# Altium PCB KUOZHAN.PCBDOC (part 5 of 21)
Units mm, origin at the board's own origin, x right, y up, seen from the top; angles counter-clockwise.
Board outline 165.51 x 116.38 mm, 2 copper layers (Top Layer, Bottom Layer); 171 components, 245 nets, 894 pads, 298 vias.
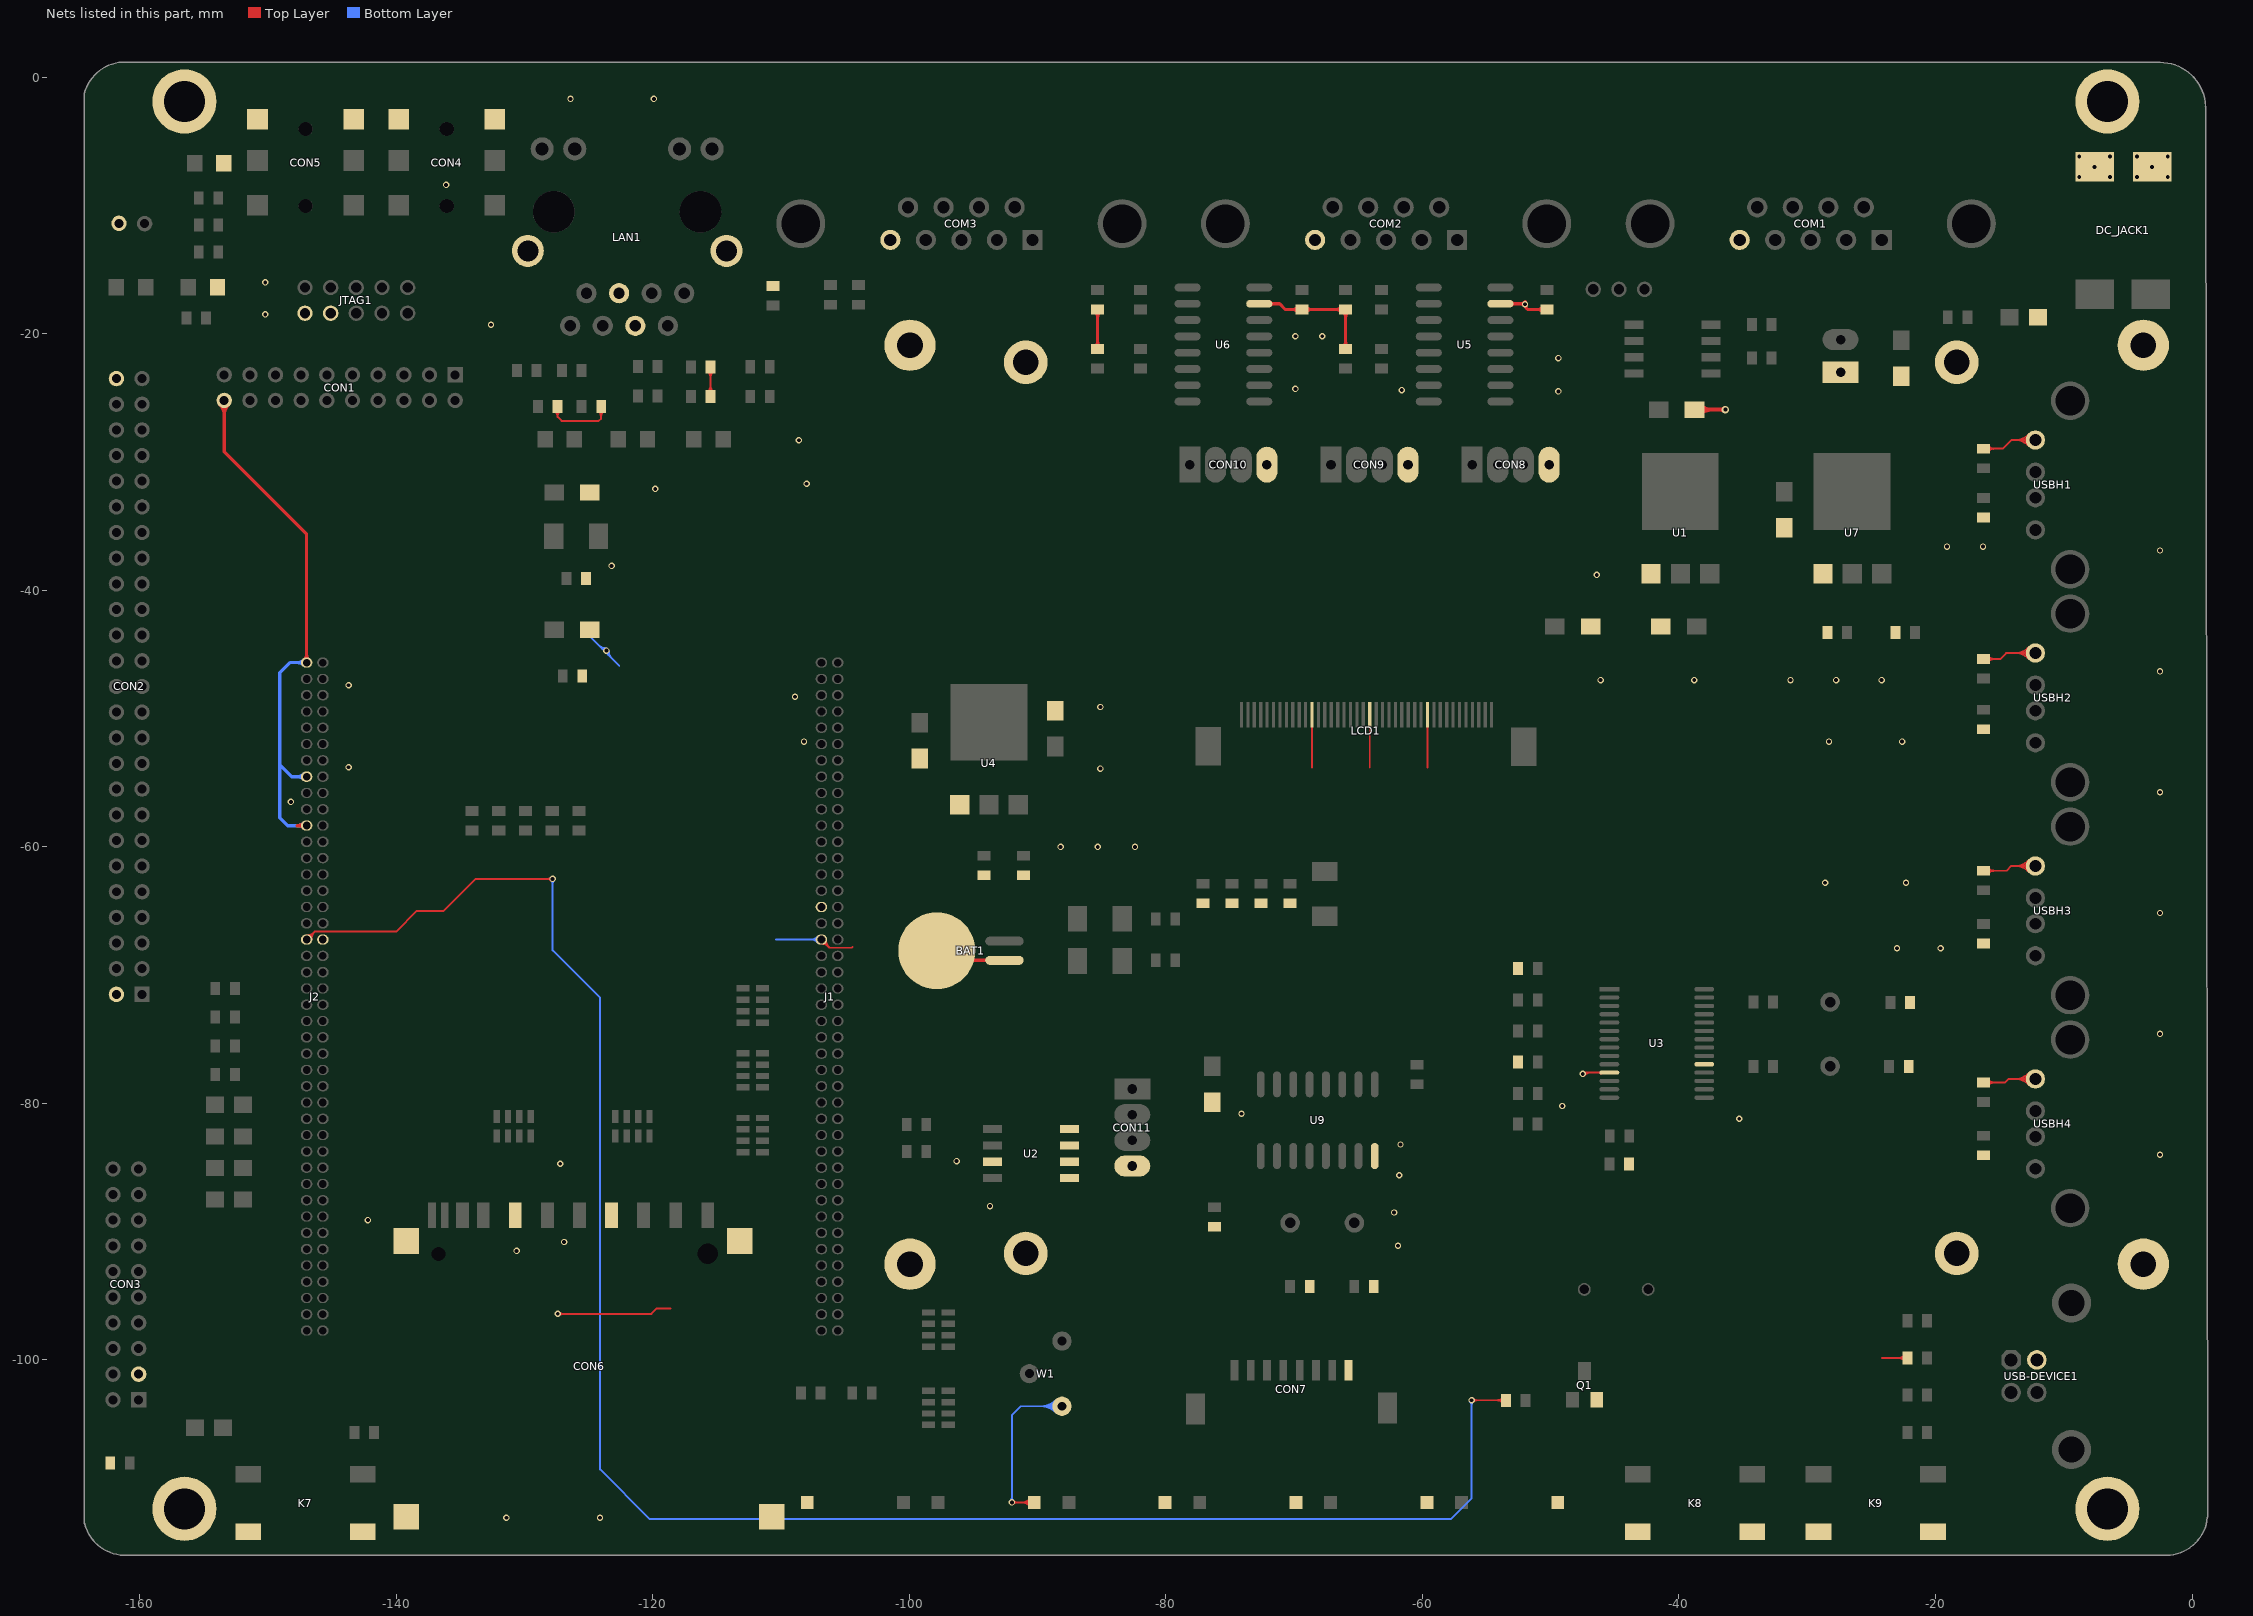
[diagram p5: the nets of this part, all layers, seen from the top]

## Via types
v1: diameter 0.5, hole 0.3, Top Layer to Bottom Layer, 272 vias
v2: diameter 0.6, hole 0.3, Top Layer to Bottom Layer, 24 vias
v3: diameter 0.9, hole 0.9, Top Layer to Bottom Layer, 2 vias

## Nets (pads, with @x,y where several pads share a name; then routed paths per layer and width w, separated by ;. In a path a pad name is that pad's centre, name@x,y a point inside that pad or via, vN(x,y) a via of type N, cw(c..) or ccw(c..) an arc to the next point about the centre after c; other vN are vias at no path point) (continued)
GND: BAT1.2 C1.2 C2.2 C3.2 C4.2 C6.2 C7.2 C8.2 C11.1 C12.1 C13.1 C14.1 C16.2 C17.1 C18.1 C19.1 C20.2 C21.2 C22.2 C23.2 C24.2 C25.2 C26.2 C27.2 C28.2 C29.2 C30.2 C31.2 C36.2 C37.2 C38.2 C39.2 C40.2 C41.2 C42.2 C43.2 CD1.2 COM1.5 COM2.5 COM3.5 CON1.20 CON2.2 CON2.50 CON3.3 CON4.1 CON4.2 CON5.1 CON5.2 CON6.3 CON6.6 CON6.12 CON6.13 CON6.14 CON6.15 CON7.8 CON8.4 CON9.4 CON10.4 CON11.4 CON12.1 DC_JACK1.1 DC_JACK1.4 J1.31 J1.35 J2.1 J2.15 J2.21 JTAG1.8 JTAG1.10 K1.2 K2.2 K3.2 K4.2 K5.2 K6.2 K7.1 K7.2 K8.3 K8.4 K9.1 K9.2 LAN1.4 LAN1.5 LAN1.A LAN1.B LCD1.11 LCD1.20 LCD1.29 LED5.2 MIC1.2 pad. pad.0 pad.1 Q1.E R1.1 R11.1 R12.1 R23.2 R25.2 R30.2 R36.2 R37.2 R38.2 R39.2 R42.2 R43.2 R44.2 R45.2 R53.1 U1.2 U2.1 U2.2 U2.3 U2.4 U2.7 U3.11 U3.19 U4.2 U5.15 U6.15 U7.2 U9.8 USB-DEVICE1.4 USBH1.4 USBH2.4 USBH3.4 USBH4.4 W1.1 | length 416.6
  Top Layer w0.15: R12.1@-127.413,-25.66 -127.413,-26.487 ; v1(-127.4,-96.4) -120.1,-96.4 -119.7,-96 -118.6,-96 ; R11.1@-124.013,-25.66 -124.013,-26.613 -124.2,-26.8 -127.1,-26.8 -127.413,-26.487 ; CD1.2@-115.486,-24.883 C21.2@-115.486,-22.583 ; J1.35@-106.841,-67.243 -106.216,-67.868 -104.468,-67.868 -104.4,-67.8 ; v1(-92,-111.1) K2.2@-90.25,-111.1 ; v1@-91.876,-111.224 cw(c-91.578,-111.522) -91.578,-111.1 cw(c-91.578,-110.678) v1@-91.876,-110.976 ; K2.2@-90.551,-111.401 ccw(c-91.276,-112.126) -91.276,-111.1 ccw(c-91.276,-110.074) K2.2@-90.551,-110.799 ; K2.2@-90.444,-111.294 ccw(c-90.914,-111.764) -90.914,-111.1 ccw(c-90.914,-110.436) K2.2@-90.444,-110.906 ; -68.6,-53.8 LCD1.29@-68.6,-49.7 ; -64.1,-53.8 LCD1.20@-64.1,-49.7 ; -59.6,-53.8 LCD1.11@-59.6,-49.7 ; v1(-47.5,-77.7) -47.4,-77.6 U3.11@-45.35,-77.6 ; v1@-47.482,-77.718 cw(c-47.198,-78.002) -47.198,-77.6 ; v1@-47.376,-77.824 cw(c-46.836,-78.364) -46.836,-77.6 ; U3.11@-46.099,-77.664 ccw(c-46.252,-77.817) -46.252,-77.6 ccw(c-46.252,-77.383) U3.11@-46.099,-77.536 ; U3.11@-46.044,-77.664 ccw(c-46.197,-77.817) -46.197,-77.6 ccw(c-46.197,-77.383) U3.11@-46.044,-77.536 ; -24.159,-99.841 R25.2@-22.187,-99.841 ; R45.2@-16.241,-78.363 -14.563,-78.363 -14.291,-78.091 USBH4.4@-12.213,-78.091 ; R43.2@-16.241,-61.863 -14.463,-61.863 -14.091,-61.491 USBH3.4@-12.213,-61.491 ; R39.2@-16.241,-45.363 -14.963,-45.363 -14.491,-44.891 USBH2.4@-12.213,-44.891 ; R37.2@-16.241,-28.963 -14.763,-28.963 -14.091,-28.291 USBH1.4@-12.213,-28.291 ; R12.1@-127.621,-26.011 cw(c-128.062,-26.487) -127.413,-26.487 ; R12.1@-127.621,-26.011 cw(c-128.062,-26.487) -127.413,-26.487 ; R12.1@-127.621,-26.011 cw(c-128.062,-26.487) -127.413,-26.487 ; R12.1@-127.621,-26.011 cw(c-128.062,-26.487) -127.413,-26.487 ; R12.1@-127.621,-26.011 cw(c-128.062,-26.487) -127.413,-26.487 ; -127.413,-26.487 cw(c-126.763,-26.487) R12.1@-127.205,-26.011 ; -127.413,-26.487 cw(c-126.763,-26.487) R12.1@-127.205,-26.011 ; -127.413,-26.487 cw(c-126.763,-26.487) R12.1@-127.205,-26.011 ; -127.413,-26.487 cw(c-126.763,-26.487) R12.1@-127.205,-26.011 ; -127.413,-26.487 cw(c-126.763,-26.487) R12.1@-127.205,-26.011 ; -126.978,-96.4 cw(c-126.978,-95.978) -127.276,-96.276 ccw(c-126.978,-95.978) -126.978,-96.4 ; -126.978,-96.4 ccw(c-126.978,-96.822) -127.276,-96.524 cw(c-126.978,-96.822) -126.978,-96.4 ; R11.1@-124.229,-26.003 cw(c-124.751,-26.525) -124.013,-26.525 ; R11.1@-124.229,-26.003 cw(c-124.751,-26.525) -124.013,-26.525 ; R11.1@-124.229,-26.003 cw(c-124.751,-26.525) -124.013,-26.525 ; R11.1@-124.229,-26.003 cw(c-124.751,-26.525) -124.013,-26.525 ; R11.1@-124.229,-26.003 cw(c-124.751,-26.525) -124.013,-26.525 ; -124.013,-26.525 cw(c-123.274,-26.525) R11.1@-123.796,-26.003 ; -124.013,-26.525 cw(c-123.274,-26.525) R11.1@-123.796,-26.003 ; -124.013,-26.525 cw(c-123.274,-26.525) R11.1@-123.796,-26.003 ; -124.013,-26.525 cw(c-123.274,-26.525) R11.1@-123.796,-26.003 ; -124.013,-26.525 cw(c-123.274,-26.525) R11.1@-123.796,-26.003 ; CD1.2@-115.702,-24.54 ccw(c-116.225,-24.018) -115.486,-24.018 ; CD1.2@-115.702,-24.54 ccw(c-116.225,-24.018) -115.486,-24.018 ; CD1.2@-115.702,-24.54 ccw(c-116.225,-24.018) -115.486,-24.018 ; CD1.2@-115.702,-24.54 ccw(c-116.225,-24.018) -115.486,-24.018 ; CD1.2@-115.702,-24.54 ccw(c-116.225,-24.018) -115.486,-24.018 ; C21.2@-115.702,-22.927 cw(c-116.225,-23.449) -115.486,-23.449 ; C21.2@-115.702,-22.927 cw(c-116.225,-23.449) -115.486,-23.449 ; C21.2@-115.702,-22.927 cw(c-116.225,-23.449) -115.486,-23.449 ; C21.2@-115.702,-22.927 cw(c-116.225,-23.449) -115.486,-23.449 ; C21.2@-115.702,-22.927 cw(c-116.225,-23.449) -115.486,-23.449 ; -115.486,-24.018 ccw(c-114.747,-24.018) CD1.2@-115.269,-24.54 ; -115.486,-24.018 ccw(c-114.747,-24.018) CD1.2@-115.269,-24.54 ; -115.486,-24.018 ccw(c-114.747,-24.018) CD1.2@-115.269,-24.54 ; -115.486,-24.018 ccw(c-114.747,-24.018) CD1.2@-115.269,-24.54 ; -115.486,-24.018 ccw(c-114.747,-24.018) CD1.2@-115.269,-24.54 ; -115.486,-23.449 cw(c-114.747,-23.449) C21.2@-115.269,-22.927 ; -115.486,-23.449 cw(c-114.747,-23.449) C21.2@-115.269,-22.927 ; -115.486,-23.449 cw(c-114.747,-23.449) C21.2@-115.269,-22.927 ; -115.486,-23.449 cw(c-114.747,-23.449) C21.2@-115.269,-22.927 ; -115.486,-23.449 cw(c-114.747,-23.449) C21.2@-115.269,-22.927 ; -22.926,-99.841 cw(c-22.926,-100.58) R25.2@-22.404,-100.058 ; -22.926,-99.841 ccw(c-22.926,-99.103) R25.2@-22.404,-99.625 ; -22.926,-99.841 cw(c-22.926,-100.58) R25.2@-22.404,-100.058 ; -22.926,-99.841 ccw(c-22.926,-99.103) R25.2@-22.404,-99.625 ; -22.926,-99.841 cw(c-22.926,-100.58) R25.2@-22.404,-100.058 ; -22.926,-99.841 ccw(c-22.926,-99.103) R25.2@-22.404,-99.625 ; -22.926,-99.841 cw(c-22.926,-100.58) R25.2@-22.404,-100.058 ; -22.926,-99.841 ccw(c-22.926,-99.103) R25.2@-22.404,-99.625 ; -22.926,-99.841 ccw(c-22.926,-99.103) R25.2@-22.404,-99.625 ; -22.926,-99.841 cw(c-22.926,-100.58) R25.2@-22.404,-100.058 ; R45.2@-15.898,-78.58 cw(c-15.376,-79.102) -15.376,-78.363 ; R45.2@-15.898,-78.58 cw(c-15.376,-79.102) -15.376,-78.363 ; R45.2@-15.898,-78.58 cw(c-15.376,-79.102) -15.376,-78.363 ; R45.2@-15.898,-78.58 cw(c-15.376,-79.102) -15.376,-78.363 ; R45.2@-15.898,-78.58 cw(c-15.376,-79.102) -15.376,-78.363 ; R45.2@-15.898,-78.147 ccw(c-15.376,-77.625) -15.376,-78.363 ; R45.2@-15.898,-78.147 ccw(c-15.376,-77.625) -15.376,-78.363 ; R45.2@-15.898,-78.147 ccw(c-15.376,-77.625) -15.376,-78.363 ; R45.2@-15.898,-78.147 ccw(c-15.376,-77.625) -15.376,-78.363 ; R45.2@-15.898,-78.147 ccw(c-15.376,-77.625) -15.376,-78.363 ; R43.2@-15.898,-62.08 cw(c-15.376,-62.602) -15.376,-61.863 ; R43.2@-15.898,-62.08 cw(c-15.376,-62.602) -15.376,-61.863 ; R43.2@-15.898,-62.08 cw(c-15.376,-62.602) -15.376,-61.863 ; R43.2@-15.898,-62.08 cw(c-15.376,-62.602) -15.376,-61.863 ; R43.2@-15.898,-62.08 cw(c-15.376,-62.602) -15.376,-61.863 ; R43.2@-15.898,-61.647 ccw(c-15.376,-61.125) -15.376,-61.863 ; R43.2@-15.898,-61.647 ccw(c-15.376,-61.125) -15.376,-61.863 ; R43.2@-15.898,-61.647 ccw(c-15.376,-61.125) -15.376,-61.863 ; R43.2@-15.898,-61.647 ccw(c-15.376,-61.125) -15.376,-61.863 ; R43.2@-15.898,-61.647 ccw(c-15.376,-61.125) -15.376,-61.863 ; R39.2@-15.898,-45.58 cw(c-15.376,-46.102) -15.376,-45.363 ; R39.2@-15.898,-45.58 cw(c-15.376,-46.102) -15.376,-45.363 ; R39.2@-15.898,-45.58 cw(c-15.376,-46.102) -15.376,-45.363 ; R39.2@-15.898,-45.58 cw(c-15.376,-46.102) -15.376,-45.363 ; R39.2@-15.898,-45.58 cw(c-15.376,-46.102) -15.376,-45.363 ; R39.2@-15.898,-45.147 ccw(c-15.376,-44.625) -15.376,-45.363 ; R39.2@-15.898,-45.147 ccw(c-15.376,-44.625) -15.376,-45.363 ; R39.2@-15.898,-45.147 ccw(c-15.376,-44.625) -15.376,-45.363 ; R39.2@-15.898,-45.147 ccw(c-15.376,-44.625) -15.376,-45.363 ; R39.2@-15.898,-45.147 ccw(c-15.376,-44.625) -15.376,-45.363 ; R37.2@-15.898,-29.18 cw(c-15.376,-29.702) -15.376,-28.963 ; R37.2@-15.898,-29.18 cw(c-15.376,-29.702) -15.376,-28.963 ; R37.2@-15.898,-29.18 cw(c-15.376,-29.702) -15.376,-28.963 ; R37.2@-15.898,-29.18 cw(c-15.376,-29.702) -15.376,-28.963 ; R37.2@-15.898,-29.18 cw(c-15.376,-29.702) -15.376,-28.963 ; R37.2@-15.898,-28.747 ccw(c-15.376,-28.225) -15.376,-28.963 ; R37.2@-15.898,-28.747 ccw(c-15.376,-28.225) -15.376,-28.963 ; R37.2@-15.898,-28.747 ccw(c-15.376,-28.225) -15.376,-28.963 ; R37.2@-15.898,-28.747 ccw(c-15.376,-28.225) -15.376,-28.963 ; R37.2@-15.898,-28.747 ccw(c-15.376,-28.225) -15.376,-28.963 ; -13.843,-78.091 cw(c-13.843,-79.721) USBH4.4@-12.691,-78.569 ; -13.843,-78.091 ccw(c-13.843,-76.462) USBH4.4@-12.691,-77.614 ; -13.843,-78.091 cw(c-13.843,-79.721) USBH4.4@-12.691,-78.569 ; -13.843,-78.091 ccw(c-13.843,-76.462) USBH4.4@-12.691,-77.614 ; -13.843,-78.091 cw(c-13.843,-79.721) USBH4.4@-12.691,-78.569 ; -13.843,-78.091 ccw(c-13.843,-76.462) USBH4.4@-12.691,-77.614 ; -13.843,-78.091 cw(c-13.843,-79.721) USBH4.4@-12.691,-78.569 ; -13.843,-78.091 ccw(c-13.843,-76.462) USBH4.4@-12.691,-77.614 ; -13.843,-78.091 ccw(c-13.843,-76.462) USBH4.4@-12.691,-77.614 ; -13.843,-78.091 cw(c-13.843,-79.721) USBH4.4@-12.691,-78.569 ; -13.843,-61.491 cw(c-13.843,-63.121) USBH3.4@-12.691,-61.969 ; -13.843,-61.491 ccw(c-13.843,-59.862) USBH3.4@-12.691,-61.014 ; -13.843,-61.491 cw(c-13.843,-63.121) USBH3.4@-12.691,-61.969 ; -13.843,-61.491 ccw(c-13.843,-59.862) USBH3.4@-12.691,-61.014 ; -13.843,-61.491 cw(c-13.843,-63.121) USBH3.4@-12.691,-61.969 ; -13.843,-61.491 ccw(c-13.843,-59.862) USBH3.4@-12.691,-61.014 ; -13.843,-61.491 cw(c-13.843,-63.121) USBH3.4@-12.691,-61.969 ; -13.843,-61.491 ccw(c-13.843,-59.862) USBH3.4@-12.691,-61.014 ; -13.843,-61.491 ccw(c-13.843,-59.862) USBH3.4@-12.691,-61.014 ; -13.843,-61.491 cw(c-13.843,-63.121) USBH3.4@-12.691,-61.969 ; -13.843,-44.891 cw(c-13.843,-46.521) USBH2.4@-12.691,-45.369 ; -13.843,-44.891 ccw(c-13.843,-43.262) USBH2.4@-12.691,-44.414 ; -13.843,-44.891 cw(c-13.843,-46.521) USBH2.4@-12.691,-45.369 ; -13.843,-44.891 ccw(c-13.843,-43.262) USBH2.4@-12.691,-44.414 ; -13.843,-44.891 cw(c-13.843,-46.521) USBH2.4@-12.691,-45.369 ; -13.843,-44.891 ccw(c-13.843,-43.262) USBH2.4@-12.691,-44.414 ; -13.843,-44.891 cw(c-13.843,-46.521) USBH2.4@-12.691,-45.369 ; -13.843,-44.891 ccw(c-13.843,-43.262) USBH2.4@-12.691,-44.414 ; -13.843,-44.891 ccw(c-13.843,-43.262) USBH2.4@-12.691,-44.414 ; -13.843,-44.891 cw(c-13.843,-46.521) USBH2.4@-12.691,-45.369 ; -13.843,-28.291 cw(c-13.843,-29.921) USBH1.4@-12.691,-28.769 ; -13.843,-28.291 ccw(c-13.843,-26.662) USBH1.4@-12.691,-27.814 ; -13.843,-28.291 cw(c-13.843,-29.921) USBH1.4@-12.691,-28.769 ; -13.843,-28.291 ccw(c-13.843,-26.662) USBH1.4@-12.691,-27.814 ; -13.843,-28.291 cw(c-13.843,-29.921) USBH1.4@-12.691,-28.769 ; -13.843,-28.291 ccw(c-13.843,-26.662) USBH1.4@-12.691,-27.814 ; -13.843,-28.291 cw(c-13.843,-29.921) USBH1.4@-12.691,-28.769 ; -13.843,-28.291 ccw(c-13.843,-26.662) USBH1.4@-12.691,-27.814 ; -13.843,-28.291 ccw(c-13.843,-26.662) USBH1.4@-12.691,-27.814 ; -13.843,-28.291 cw(c-13.843,-29.921) USBH1.4@-12.691,-28.769 ; -13.481,-78.091 cw(c-13.481,-79.359) USBH4.4@-12.585,-78.462 ; -13.481,-78.091 ccw(c-13.481,-76.824) USBH4.4@-12.585,-77.72 ; -13.481,-78.091 cw(c-13.481,-79.359) USBH4.4@-12.585,-78.462 ; -13.481,-78.091 ccw(c-13.481,-76.824) USBH4.4@-12.585,-77.72 ; -13.481,-78.091 cw(c-13.481,-79.359) USBH4.4@-12.585,-78.462 ; -13.481,-78.091 ccw(c-13.481,-76.824) USBH4.4@-12.585,-77.72 ; -13.481,-78.091 cw(c-13.481,-79.359) USBH4.4@-12.585,-78.462 ; -13.481,-78.091 ccw(c-13.481,-76.824) USBH4.4@-12.585,-77.72 ; -13.481,-78.091 ccw(c-13.481,-76.824) USBH4.4@-12.585,-77.72 ; -13.481,-78.091 cw(c-13.481,-79.359) USBH4.4@-12.585,-78.462 ; -13.481,-61.491 cw(c-13.481,-62.759) USBH3.4@-12.585,-61.862 ; -13.481,-61.491 ccw(c-13.481,-60.224) USBH3.4@-12.585,-61.12 ; -13.481,-61.491 cw(c-13.481,-62.759) USBH3.4@-12.585,-61.862 ; -13.481,-61.491 ccw(c-13.481,-60.224) USBH3.4@-12.585,-61.12 ; -13.481,-61.491 cw(c-13.481,-62.759) USBH3.4@-12.585,-61.862 ; -13.481,-61.491 ccw(c-13.481,-60.224) USBH3.4@-12.585,-61.12 ; -13.481,-61.491 cw(c-13.481,-62.759) USBH3.4@-12.585,-61.862 ; -13.481,-61.491 ccw(c-13.481,-60.224) USBH3.4@-12.585,-61.12 ; -13.481,-61.491 ccw(c-13.481,-60.224) USBH3.4@-12.585,-61.12 ; -13.481,-61.491 cw(c-13.481,-62.759) USBH3.4@-12.585,-61.862 ; -13.481,-44.891 cw(c-13.481,-46.159) USBH2.4@-12.585,-45.262 ; -13.481,-44.891 ccw(c-13.481,-43.624) USBH2.4@-12.585,-44.52 ; -13.481,-44.891 cw(c-13.481,-46.159) USBH2.4@-12.585,-45.262 ; -13.481,-44.891 ccw(c-13.481,-43.624) USBH2.4@-12.585,-44.52 ; -13.481,-44.891 cw(c-13.481,-46.159) USBH2.4@-12.585,-45.262 ; -13.481,-44.891 ccw(c-13.481,-43.624) USBH2.4@-12.585,-44.52 ; -13.481,-44.891 cw(c-13.481,-46.159) USBH2.4@-12.585,-45.262 ; -13.481,-44.891 ccw(c-13.481,-43.624) USBH2.4@-12.585,-44.52 ; -13.481,-44.891 ccw(c-13.481,-43.624) USBH2.4@-12.585,-44.52 ; -13.481,-44.891 cw(c-13.481,-46.159) USBH2.4@-12.585,-45.262 ; -13.481,-28.291 cw(c-13.481,-29.559) USBH1.4@-12.585,-28.662 ; -13.481,-28.291 ccw(c-13.481,-27.024) USBH1.4@-12.585,-27.92 ; -13.481,-28.291 cw(c-13.481,-29.559) USBH1.4@-12.585,-28.662 ; -13.481,-28.291 ccw(c-13.481,-27.024) USBH1.4@-12.585,-27.92 ; -13.481,-28.291 cw(c-13.481,-29.559) USBH1.4@-12.585,-28.662 ; -13.481,-28.291 ccw(c-13.481,-27.024) USBH1.4@-12.585,-27.92 ; -13.481,-28.291 cw(c-13.481,-29.559) USBH1.4@-12.585,-28.662 ; -13.481,-28.291 ccw(c-13.481,-27.024) USBH1.4@-12.585,-27.92 ; -13.481,-28.291 ccw(c-13.481,-27.024) USBH1.4@-12.585,-27.92 ; -13.481,-28.291 cw(c-13.481,-29.559) USBH1.4@-12.585,-28.662 ; -13.119,-78.091 cw(c-13.119,-78.997) USBH4.4@-12.479,-78.356 ; -13.119,-78.091 ccw(c-13.119,-77.186) USBH4.4@-12.479,-77.826 ; -13.119,-78.091 cw(c-13.119,-78.997) USBH4.4@-12.479,-78.356 ; -13.119,-78.091 ccw(c-13.119,-77.186) USBH4.4@-12.479,-77.826 ; -13.119,-78.091 cw(c-13.119,-78.997) USBH4.4@-12.479,-78.356 ; -13.119,-78.091 ccw(c-13.119,-77.186) USBH4.4@-12.479,-77.826 ; -13.119,-78.091 cw(c-13.119,-78.997) USBH4.4@-12.479,-78.356 ; -13.119,-78.091 ccw(c-13.119,-77.186) USBH4.4@-12.479,-77.826 ; -13.119,-78.091 ccw(c-13.119,-77.186) USBH4.4@-12.479,-77.826 ; -13.119,-78.091 cw(c-13.119,-78.997) USBH4.4@-12.479,-78.356 ; -13.119,-61.491 cw(c-13.119,-62.397) USBH3.4@-12.479,-61.756 ; -13.119,-61.491 ccw(c-13.119,-60.586) USBH3.4@-12.479,-61.226 ; -13.119,-61.491 cw(c-13.119,-62.397) USBH3.4@-12.479,-61.756 ; -13.119,-61.491 ccw(c-13.119,-60.586) USBH3.4@-12.479,-61.226 ; -13.119,-61.491 cw(c-13.119,-62.397) USBH3.4@-12.479,-61.756 ; -13.119,-61.491 ccw(c-13.119,-60.586) USBH3.4@-12.479,-61.226 ; -13.119,-61.491 cw(c-13.119,-62.397) USBH3.4@-12.479,-61.756 ; -13.119,-61.491 ccw(c-13.119,-60.586) USBH3.4@-12.479,-61.226 ; -13.119,-61.491 ccw(c-13.119,-60.586) USBH3.4@-12.479,-61.226 ; -13.119,-61.491 cw(c-13.119,-62.397) USBH3.4@-12.479,-61.756 ; -13.119,-44.891 cw(c-13.119,-45.797) USBH2.4@-12.479,-45.156 ; -13.119,-44.891 ccw(c-13.119,-43.986) USBH2.4@-12.479,-44.626 ; -13.119,-44.891 cw(c-13.119,-45.797) USBH2.4@-12.479,-45.156 ; -13.119,-44.891 ccw(c-13.119,-43.986) USBH2.4@-12.479,-44.626 ; -13.119,-44.891 cw(c-13.119,-45.797) USBH2.4@-12.479,-45.156 ; -13.119,-44.891 ccw(c-13.119,-43.986) USBH2.4@-12.479,-44.626 ; -13.119,-44.891 cw(c-13.119,-45.797) USBH2.4@-12.479,-45.156 ; -13.119,-44.891 ccw(c-13.119,-43.986) USBH2.4@-12.479,-44.626 ; -13.119,-44.891 ccw(c-13.119,-43.986) USBH2.4@-12.479,-44.626 ; -13.119,-44.891 cw(c-13.119,-45.797) USBH2.4@-12.479,-45.156 ; -13.119,-28.291 cw(c-13.119,-29.197) USBH1.4@-12.479,-28.556 ; -13.119,-28.291 ccw(c-13.119,-27.386) USBH1.4@-12.479,-28.026 ; -13.119,-28.291 cw(c-13.119,-29.197) USBH1.4@-12.479,-28.556 ; -13.119,-28.291 ccw(c-13.119,-27.386) USBH1.4@-12.479,-28.026 ; -13.119,-28.291 cw(c-13.119,-29.197) USBH1.4@-12.479,-28.556 ; -13.119,-28.291 ccw(c-13.119,-27.386) USBH1.4@-12.479,-28.026 ; -13.119,-28.291 cw(c-13.119,-29.197) USBH1.4@-12.479,-28.556 ; -13.119,-28.291 ccw(c-13.119,-27.386) USBH1.4@-12.479,-28.026 ; -13.119,-28.291 ccw(c-13.119,-27.386) USBH1.4@-12.479,-28.026 ; -13.119,-28.291 cw(c-13.119,-29.197) USBH1.4@-12.479,-28.556 ; J1.35@-106.791,-67.554 cw(c-106.791,-68.185) -106.345,-67.739 ccw(c-106.791,-68.185) J1.35@-106.791,-67.554 ; J1.35@-106.616,-67.241 ccw(c-106.151,-67.274) -106.481,-67.603 cw(c-106.151,-67.274) J1.35@-106.616,-67.241 ; J1.35@-106.467,-67.252 ccw(c-105.715,-67.304) -106.248,-67.836 cw(c-105.715,-67.304) J1.35@-106.467,-67.252
  Top Layer w0.254: CON1.20@-153.394,-25.203 -153.394,-29.206 -146.973,-35.627 J2.1@-146.973,-45.638 ; -147.701,-58.347 ccw(c-147.701,-57.661) J2.21@-147.216,-58.146 ; -147.663,-58.347 cw(c-147.663,-58.98) J2.21@-147.216,-58.532 ; C39.2@-85.317,-21.196 C38.2@-85.317,-18.114 ; U6.15@-72.712,-17.67 -71.13,-17.67 -70.686,-18.114 C27.2@-69.383,-18.114 C36.2@-65.983,-18.114 C37.2@-65.983,-21.196 ; U5.15@-53.912,-17.67 -52.23,-17.67 -51.786,-18.114 C26.2@-50.283,-18.114 ; -52.369,-17.67 cw(c-52.369,-18.069) v1@-52.087,-17.787 ; -52.366,-17.67 ccw(c-52.366,-17.134) v1@-51.987,-17.513 ; v1@-51.902,-17.774 ccw(c-51.757,-17.885) -51.886,-18.014 ; CON1.20@-153.728,-25.537 cw(c-154.536,-26.345) -153.394,-26.345 ; CON1.20@-153.728,-25.537 cw(c-154.536,-26.345) -153.394,-26.345 ; CON1.20@-153.728,-25.537 cw(c-154.536,-26.345) -153.394,-26.345 ; CON1.20@-153.728,-25.537 cw(c-154.536,-26.345) -153.394,-26.345 ; CON1.20@-153.728,-25.537 cw(c-154.536,-26.345) -153.394,-26.345 ; -153.394,-26.345 cw(c-152.252,-26.345) CON1.20@-153.059,-25.537 ; -153.394,-26.345 cw(c-152.252,-26.345) CON1.20@-153.059,-25.537 ; -153.394,-26.345 cw(c-152.252,-26.345) CON1.20@-153.059,-25.537 ; -153.394,-26.345 cw(c-152.252,-26.345) CON1.20@-153.059,-25.537 ; -153.394,-26.345 cw(c-152.252,-26.345) CON1.20@-153.059,-25.537 ; -147.632,-58.347 cw(c-147.632,-59.006) J2.21@-147.166,-58.54 ; -147.632,-58.347 ccw(c-147.632,-57.688) J2.21@-147.166,-58.154 ; -147.632,-58.347 cw(c-147.632,-59.006) J2.21@-147.166,-58.54 ; -147.632,-58.347 ccw(c-147.632,-57.688) J2.21@-147.166,-58.154 ; -147.632,-58.347 cw(c-147.632,-59.006) J2.21@-147.166,-58.54 ; -147.632,-58.347 ccw(c-147.632,-57.688) J2.21@-147.166,-58.154 ; J2.1@-147.166,-45.446 ccw(c-147.632,-44.98) -146.973,-44.98 ; J2.1@-147.166,-45.445 ccw(c-147.632,-44.979) -146.973,-44.979 ; J2.1@-147.166,-45.445 ccw(c-147.632,-44.979) -146.973,-44.979 ; J2.1@-147.166,-45.445 ccw(c-147.632,-44.979) -146.973,-44.979 ; J2.1@-147.166,-45.446 ccw(c-147.632,-44.98) -146.973,-44.98 ; -146.973,-44.98 ccw(c-146.314,-44.98) J2.1@-146.78,-45.446 ; -146.973,-44.979 ccw(c-146.314,-44.979) J2.1@-146.78,-45.445 ; -146.973,-44.979 ccw(c-146.314,-44.979) J2.1@-146.78,-45.445 ; -146.973,-44.979 ccw(c-146.314,-44.979) J2.1@-146.78,-45.445 ; -146.973,-44.98 ccw(c-146.314,-44.98) J2.1@-146.78,-45.446 ; C39.2@-85.496,-21.017 ccw(c-85.93,-20.583) -85.317,-20.583 ; C39.2@-85.496,-21.017 ccw(c-85.93,-20.583) -85.317,-20.583 ; C39.2@-85.496,-21.017 ccw(c-85.93,-20.583) -85.317,-20.583 ; C39.2@-85.496,-21.017 ccw(c-85.93,-20.583) -85.317,-20.583 ; C39.2@-85.496,-21.017 ccw(c-85.93,-20.583) -85.317,-20.583 ; C38.2@-85.496,-18.294 cw(c-85.93,-18.727) -85.317,-18.727 ; C38.2@-85.496,-18.294 cw(c-85.93,-18.727) -85.317,-18.727 ; C38.2@-85.496,-18.294 cw(c-85.93,-18.727) -85.317,-18.727 ; C38.2@-85.496,-18.294 cw(c-85.93,-18.727) -85.317,-18.727 ; C38.2@-85.496,-18.294 cw(c-85.93,-18.727) -85.317,-18.727 ; -85.317,-20.583 ccw(c-84.703,-20.583) C39.2@-85.137,-21.017 ; -85.317,-20.583 ccw(c-84.703,-20.583) C39.2@-85.137,-21.017 ; -85.317,-20.583 ccw(c-84.703,-20.583) C39.2@-85.137,-21.017 ; -85.317,-20.583 ccw(c-84.703,-20.583) C39.2@-85.137,-21.017 ; -85.317,-20.583 ccw(c-84.703,-20.583) C39.2@-85.137,-21.017 ; -85.317,-18.727 cw(c-84.703,-18.727) C38.2@-85.137,-18.294 ; -85.317,-18.727 cw(c-84.703,-18.727) C38.2@-85.137,-18.294 ; -85.317,-18.727 cw(c-84.703,-18.727) C38.2@-85.137,-18.294 ; -85.317,-18.727 cw(c-84.703,-18.727) C38.2@-85.137,-18.294 ; -85.317,-18.727 cw(c-84.703,-18.727) C38.2@-85.137,-18.294 ; U6.15@-71.875,-17.796 cw(c-71.572,-18.099) -71.572,-17.67 ; U6.15@-71.875,-17.796 cw(c-71.572,-18.099) -71.572,-17.67 ; U6.15@-71.875,-17.796 cw(c-71.572,-18.099) -71.572,-17.67 ; U6.15@-71.875,-17.796 cw(c-71.572,-18.099) -71.572,-17.67 ; U6.15@-71.875,-17.796 cw(c-71.572,-18.099) -71.572,-17.67 ; U6.15@-71.875,-17.544 ccw(c-71.572,-17.241) -71.572,-17.67 ; U6.15@-71.875,-17.544 ccw(c-71.572,-17.241) -71.572,-17.67 ; U6.15@-71.875,-17.544 ccw(c-71.572,-17.241) -71.572,-17.67 ; U6.15@-71.875,-17.544 ccw(c-71.572,-17.241) -71.572,-17.67 ; U6.15@-71.875,-17.544 ccw(c-71.572,-17.241) -71.572,-17.67 ; -70.124,-18.114 cw(c-70.124,-18.727) C27.2@-69.69,-18.294 ; -70.124,-18.114 ccw(c-70.124,-17.501) C27.2@-69.69,-17.935 ; -70.124,-18.114 cw(c-70.124,-18.727) C27.2@-69.69,-18.294 ; -70.124,-18.114 ccw(c-70.124,-17.501) C27.2@-69.69,-17.935 ; -70.124,-18.114 cw(c-70.124,-18.727) C27.2@-69.69,-18.294 ; -70.124,-18.114 ccw(c-70.124,-17.501) C27.2@-69.69,-17.935 ; -70.124,-18.114 cw(c-70.124,-18.727) C27.2@-69.69,-18.294 ; -70.124,-18.114 ccw(c-70.124,-17.501) C27.2@-69.69,-17.935 ; -70.124,-18.114 ccw(c-70.124,-17.501) C27.2@-69.69,-17.935 ; -70.124,-18.114 cw(c-70.124,-18.727) C27.2@-69.69,-18.294 ; C27.2@-69.077,-18.294 cw(c-68.643,-18.727) -68.643,-18.114 ; C27.2@-69.077,-18.294 cw(c-68.643,-18.727) -68.643,-18.114 ; C27.2@-69.077,-18.294 cw(c-68.643,-18.727) -68.643,-18.114 ; C27.2@-69.077,-18.294 cw(c-68.643,-18.727) -68.643,-18.114 ; C27.2@-69.077,-18.294 cw(c-68.643,-18.727) -68.643,-18.114 ; C27.2@-69.077,-17.935 ccw(c-68.643,-17.501) -68.643,-18.114 ; C27.2@-69.077,-17.935 ccw(c-68.643,-17.501) -68.643,-18.114 ; C27.2@-69.077,-17.935 ccw(c-68.643,-17.501) -68.643,-18.114 ; C27.2@-69.077,-17.935 ccw(c-68.643,-17.501) -68.643,-18.114 ; C27.2@-69.077,-17.935 ccw(c-68.643,-17.501) -68.643,-18.114 ; -66.724,-18.114 cw(c-66.724,-18.727) C36.2@-66.29,-18.294 ; -66.724,-18.114 ccw(c-66.724,-17.501) C36.2@-66.29,-17.935 ; -66.724,-18.114 cw(c-66.724,-18.727) C36.2@-66.29,-18.294 ; -66.724,-18.114 ccw(c-66.724,-17.501) C36.2@-66.29,-17.935 ; -66.724,-18.114 cw(c-66.724,-18.727) C36.2@-66.29,-18.294 ; -66.724,-18.114 ccw(c-66.724,-17.501) C36.2@-66.29,-17.935 ; -66.724,-18.114 cw(c-66.724,-18.727) C36.2@-66.29,-18.294 ; -66.724,-18.114 ccw(c-66.724,-17.501) C36.2@-66.29,-17.935 ; -66.724,-18.114 ccw(c-66.724,-17.501) C36.2@-66.29,-17.935 ; -66.724,-18.114 cw(c-66.724,-18.727) C36.2@-66.29,-18.294 ; C37.2@-66.163,-21.017 ccw(c-66.597,-20.583) -65.983,-20.583 ; C37.2@-66.163,-21.017 ccw(c-66.597,-20.583) -65.983,-20.583 ; C37.2@-66.163,-21.017 ccw(c-66.597,-20.583) -65.983,-20.583 ; C37.2@-66.163,-21.017 ccw(c-66.597,-20.583) -65.983,-20.583 ; C37.2@-66.163,-21.017 ccw(c-66.597,-20.583) -65.983,-20.583 ; C36.2@-66.163,-18.294 cw(c-66.597,-18.727) -65.983,-18.727 ; C36.2@-66.163,-18.294 cw(c-66.597,-18.727) -65.983,-18.727 ; C36.2@-66.163,-18.294 cw(c-66.597,-18.727) -65.983,-18.727 ; C36.2@-66.163,-18.294 cw(c-66.597,-18.727) -65.983,-18.727 ; C36.2@-66.163,-18.294 cw(c-66.597,-18.727) -65.983,-18.727 ; -65.983,-20.583 ccw(c-65.37,-20.583) C37.2@-65.804,-21.017 ; -65.983,-20.583 ccw(c-65.37,-20.583) C37.2@-65.804,-21.017 ; -65.983,-20.583 ccw(c-65.37,-20.583) C37.2@-65.804,-21.017 ; -65.983,-20.583 ccw(c-65.37,-20.583) C37.2@-65.804,-21.017 ; -65.983,-20.583 ccw(c-65.37,-20.583) C37.2@-65.804,-21.017 ; -65.983,-18.727 cw(c-65.37,-18.727) C36.2@-65.804,-18.294 ; -65.983,-18.727 cw(c-65.37,-18.727) C36.2@-65.804,-18.294 ; -65.983,-18.727 cw(c-65.37,-18.727) C36.2@-65.804,-18.294 ; -65.983,-18.727 cw(c-65.37,-18.727) C36.2@-65.804,-18.294 ; -65.983,-18.727 cw(c-65.37,-18.727) C36.2@-65.804,-18.294 ; U5.15@-53.075,-17.796 cw(c-52.772,-18.099) -52.772,-17.67 ; U5.15@-53.075,-17.796 cw(c-52.772,-18.099) -52.772,-17.67 ; U5.15@-53.075,-17.796 cw(c-52.772,-18.099) -52.772,-17.67 ; U5.15@-53.075,-17.796 cw(c-52.772,-18.099) -52.772,-17.67 ; U5.15@-53.075,-17.796 cw(c-52.772,-18.099) -52.772,-17.67 ; U5.15@-53.075,-17.544 ccw(c-52.772,-17.241) -52.772,-17.67 ; U5.15@-53.075,-17.544 ccw(c-52.772,-17.241) -52.772,-17.67 ; U5.15@-53.075,-17.544 ccw(c-52.772,-17.241) -52.772,-17.67 ; U5.15@-53.075,-17.544 ccw(c-52.772,-17.241) -52.772,-17.67 ; U5.15@-53.075,-17.544 ccw(c-52.772,-17.241) -52.772,-17.67 ; -51.024,-18.114 cw(c-51.024,-18.727) C26.2@-50.59,-18.294 ; -51.024,-18.114 ccw(c-51.024,-17.501) C26.2@-50.59,-17.935 ; -51.024,-18.114 cw(c-51.024,-18.727) C26.2@-50.59,-18.294 ; -51.024,-18.114 ccw(c-51.024,-17.501) C26.2@-50.59,-17.935 ; -51.024,-18.114 cw(c-51.024,-18.727) C26.2@-50.59,-18.294 ; -51.024,-18.114 ccw(c-51.024,-17.501) C26.2@-50.59,-17.935 ; -51.024,-18.114 cw(c-51.024,-18.727) C26.2@-50.59,-18.294 ; -51.024,-18.114 ccw(c-51.024,-17.501) C26.2@-50.59,-17.935 ; -51.024,-18.114 ccw(c-51.024,-17.501) C26.2@-50.59,-17.935 ; -51.024,-18.114 cw(c-51.024,-18.727) C26.2@-50.59,-18.294
  Top Layer w0.3: C28.2@-38.786,-25.921 v2(-36.379,-25.921) ; C28.2@-38.316,-26.264 cw(c-37.488,-27.092) -37.488,-25.921 ; C28.2@-38.316,-26.264 cw(c-37.488,-27.092) -37.488,-25.921 ; C28.2@-38.316,-26.264 cw(c-37.488,-27.092) -37.488,-25.921 ; C28.2@-38.316,-26.264 cw(c-37.488,-27.092) -37.488,-25.921 ; C28.2@-38.316,-26.264 cw(c-37.488,-27.092) -37.488,-25.921 ; C28.2@-38.316,-25.578 ccw(c-37.488,-24.75) -37.488,-25.921 ; C28.2@-38.316,-25.578 ccw(c-37.488,-24.75) -37.488,-25.921 ; C28.2@-38.316,-25.578 ccw(c-37.488,-24.75) -37.488,-25.921 ; C28.2@-38.316,-25.578 ccw(c-37.488,-24.75) -37.488,-25.921 ; C28.2@-38.316,-25.578 ccw(c-37.488,-24.75) -37.488,-25.921 ; -36.741,-25.921 cw(c-36.741,-26.283) v2@-36.485,-26.027 ; -36.741,-25.921 ccw(c-36.741,-25.559) v2@-36.485,-25.815 ; -36.741,-25.921 cw(c-36.741,-26.283) v2@-36.485,-26.027 ; -36.741,-25.921 ccw(c-36.741,-25.559) v2@-36.485,-25.815 ; -36.741,-25.921 cw(c-36.741,-26.283) v2@-36.485,-26.027 ; -36.741,-25.921 ccw(c-36.741,-25.559) v2@-36.485,-25.815 ; -36.741,-25.921 cw(c-36.741,-26.283) v2@-36.485,-26.027 ; -36.741,-25.921 ccw(c-36.741,-25.559) v2@-36.485,-25.815 ; -36.741,-25.921 ccw(c-36.741,-25.559) v2@-36.485,-25.815 ; -36.741,-25.921 cw(c-36.741,-26.283) v2@-36.485,-26.027
  Bottom Layer w0.15: -124.9,-43.6 -122.6,-45.9 ; -124.24,-44.26 ccw(c-123.6,-43.62) v1@-123.6,-44.525 ; -123.984,-44.516 ccw(c-123.6,-44.132) v1@-123.6,-44.675 ; v1@-123.575,-44.7 ccw(c-123.032,-44.7) -123.416,-45.084 ; v1@-123.425,-44.7 ccw(c-122.52,-44.7) -123.16,-45.34 ; -110.371,-67.229 J1.35@-106.841,-67.229 ; J1.35@-107.121,-67.459 ccw(c-107.675,-68.014) -107.675,-67.229 ccw(c-107.675,-66.445) J1.35@-107.121,-67 ; J1.35@-107.015,-67.353 ccw(c-107.313,-67.652) -107.313,-67.229 ccw(c-107.313,-66.807) J1.35@-107.015,-67.106 ; v1@-92.124,-110.976 ccw(c-92.422,-110.678) -92,-110.678 ccw(c-91.578,-110.678) v1@-91.876,-110.976 ; v1(-92,-111.1) -92,-104.3 -91.307,-103.607 W1.1@-88.095,-103.607 ; W1.1@-88.572,-104.084 ccw(c-89.725,-105.236) -89.725,-103.607 ccw(c-89.725,-101.977) W1.1@-88.572,-103.129 ; W1.1@-88.466,-103.978 ccw(c-89.363,-104.874) -89.363,-103.607 ccw(c-89.363,-102.339) W1.1@-88.466,-103.235 ; W1.1@-88.36,-103.872 ccw(c-89,-104.512) -89,-103.607 ccw(c-89,-102.701) W1.1@-88.36,-103.341
  Bottom Layer w0.254: J2.21@-146.973,-58.347 -148.453,-58.347 -149.069,-57.731 -149.069,-53.6 ; J2.15@-146.973,-54.535 -148.135,-54.535 -149.069,-53.6 ; J2.1@-146.973,-45.638 -148.275,-45.638 -149.069,-46.433 -149.069,-53.6 ; -147.632,-58.347 cw(c-147.632,-59.006) J2.21@-147.166,-58.54 ; -147.632,-58.347 ccw(c-147.632,-57.688) J2.21@-147.166,-58.154 ; -147.632,-58.347 cw(c-147.632,-59.006) J2.21@-147.166,-58.54 ; -147.632,-58.347 ccw(c-147.632,-57.688) J2.21@-147.166,-58.154 ; -147.632,-58.347 cw(c-147.632,-59.006) J2.21@-147.166,-58.54 ; -147.632,-58.347 ccw(c-147.632,-57.688) J2.21@-147.166,-58.154 ; -147.632,-54.535 cw(c-147.632,-55.194) J2.15@-147.166,-54.728 ; -147.632,-54.535 ccw(c-147.632,-53.875) J2.15@-147.166,-54.342 ; -147.632,-54.535 cw(c-147.632,-55.194) J2.15@-147.166,-54.728 ; -147.632,-54.535 ccw(c-147.632,-53.875) J2.15@-147.166,-54.342 ; -147.632,-54.535 cw(c-147.632,-55.194) J2.15@-147.166,-54.728 ; -147.632,-54.535 ccw(c-147.632,-53.875) J2.15@-147.166,-54.342 ; -147.632,-45.638 cw(c-147.632,-46.297) J2.1@-147.166,-45.831 ; -147.632,-45.638 ccw(c-147.632,-44.979) J2.1@-147.166,-45.445 ; -147.632,-45.638 cw(c-147.632,-46.297) J2.1@-147.166,-45.831 ; -147.632,-45.638 ccw(c-147.632,-44.979) J2.1@-147.166,-45.445 ; -147.632,-45.638 cw(c-147.632,-46.297) J2.1@-147.166,-45.831 ; -147.632,-45.638 ccw(c-147.632,-44.979) J2.1@-147.166,-45.445 ; -147.701,-58.347 ccw(c-147.701,-57.661) -147.216,-58.146 cw(c-147.701,-57.661) -147.701,-58.347 ; -147.694,-54.535 ccw(c-147.694,-53.858) -147.216,-54.336 cw(c-147.694,-53.858) -147.694,-54.535 ; -147.684,-45.638 cw(c-147.684,-46.301) -147.216,-45.832 ccw(c-147.684,-46.301) -147.684,-45.638 ; -147.679,-45.638 ccw(c-147.679,-44.983) -147.216,-45.446 cw(c-147.679,-44.983) -147.679,-45.638 ; -147.669,-54.535 cw(c-147.669,-55.176) -147.216,-54.722 ccw(c-147.669,-55.176) -147.669,-54.535 ; -147.663,-58.347 cw(c-147.663,-58.98) -147.216,-58.532 ccw(c-147.663,-58.98) -147.663,-58.347
  other v1: -131.4,-112.3 -124.1,-112.3 -130.6,-91.5 -61.9,-91.1 -126.9,-90.8 -142.2,-89.1 -62.2,-88.5 -93.7,-88 -61.8,-85.6 -127.2,-84.7 -96.3,-84.5 -2.5,-84 -61.7,-83.2 -35.3,-81.2 -74.1,-80.8 -49.1,-80.2 -2.5,-74.58 -23,-67.9 -19.6,-67.9 -2.5,-65.16 -28.6,-62.8 -22.3,-62.8 -88.2,-60 -85.3,-60 -82.4,-60 -148.2,-56.5 -2.5,-55.74 -85.1,-53.9 -143.7,-53.8 -108.2,-51.8 -28.3,-51.8 -22.6,-51.8 -85.1,-49.1 -108.9,-48.3 -143.7,-47.4 -46.1,-47 -38.8,-47 -31.3,-47 -27.75,-47 -24.2,-47 -2.5,-46.32 -123.6,-44.7 -46.4,-38.8 -123.2,-38.1 -2.5,-36.9 -19.1,-36.6 -16.3,-36.6 -119.8,-32.1 -108,-31.7 -108.6,-28.3 -49.4,-24.5 -61.6,-24.4 -69.9,-24.3 -49.4,-21.9 -69.9,-20.2 -67.8,-20.2 -132.6,-19.3 -150.2,-18.5 -52,-17.7 -150.2,-16 -136.1,-8.4 -8.8,-7.789 -6.4,-7.789 -4.3,-7.789 -1.9,-7.789 -7.6,-7 -3.122,-7 -8.8,-6.2 -6.4,-6.2 -4.3,-6.2 -1.9,-6.2 -126.4,-1.7 -119.9,-1.7
GPB0: J2.35 R19.1 | length 176.5
  Top Layer w0.15: J2.35@-146.973,-67.243 -146.329,-66.6 -140,-66.6 -138.4,-65 -136.3,-65 -133.8,-62.5 v1(-127.8,-62.5) ; v1@-127.888,-62.588 ccw(c-128.102,-62.802) -128.102,-62.5 ccw(c-128.102,-62.198) v1@-127.888,-62.412 ; v1(-56.16,-103.14) R19.1@-53.487,-103.14 ; v1@-56.071,-103.229 cw(c-55.858,-103.442) -55.858,-103.14 cw(c-55.858,-102.839) v1@-56.071,-103.052 ; J2.35@-146.973,-67.068 ccw(c-146.973,-66.646) J2.35@-146.674,-66.945 ; J2.35@-146.973,-67.068 ccw(c-146.973,-66.646) J2.35@-146.674,-66.945 ; J2.35@-146.973,-67.068 ccw(c-146.973,-66.646) J2.35@-146.674,-66.945 ; J2.35@-146.973,-66.918 ccw(c-146.973,-66.134) -146.418,-66.689 ; J2.35@-146.973,-66.918 ccw(c-146.973,-66.134) -146.418,-66.689 ; J2.35@-146.973,-66.918 ccw(c-146.973,-66.134) -146.418,-66.689 ; J2.35@-146.798,-67.243 cw(c-146.375,-67.243) J2.35@-146.674,-66.945 ; J2.35@-146.798,-67.243 cw(c-146.375,-67.243) J2.35@-146.674,-66.945 ; J2.35@-146.798,-67.243 cw(c-146.375,-67.243) J2.35@-146.674,-66.945 ; J2.35@-146.648,-67.243 cw(c-145.863,-67.243) -146.418,-66.689 ; J2.35@-146.648,-67.243 cw(c-145.863,-67.243) -146.418,-66.689 ; J2.35@-146.648,-67.243 cw(c-145.863,-67.243) -146.418,-66.689 ; -128.222,-62.5 cw(c-128.222,-62.922) v1@-127.924,-62.624 ; -128.222,-62.5 ccw(c-128.222,-62.078) v1@-127.924,-62.376 ; -128.222,-62.5 cw(c-128.222,-62.922) v1@-127.924,-62.624 ; -128.222,-62.5 ccw(c-128.222,-62.078) v1@-127.924,-62.376 ; -128.222,-62.5 cw(c-128.222,-62.922) v1@-127.924,-62.624 ; -128.222,-62.5 ccw(c-128.222,-62.078) v1@-127.924,-62.376 ; -128.222,-62.5 ccw(c-128.222,-62.078) v1@-127.924,-62.376 ; -128.222,-62.5 cw(c-128.222,-62.922) v1@-127.924,-62.624 ; v1@-56.036,-103.264 cw(c-55.737,-103.563) -55.737,-103.14 ; v1@-56.036,-103.264 cw(c-55.737,-103.563) -55.737,-103.14 ; v1@-56.036,-103.264 cw(c-55.737,-103.563) -55.737,-103.14 ; v1@-56.036,-103.264 cw(c-55.737,-103.563) -55.737,-103.14 ; v1@-56.036,-103.017 ccw(c-55.737,-102.718) -55.737,-103.14 ; v1@-56.036,-103.017 ccw(c-55.737,-102.718) -55.737,-103.14 ; v1@-56.036,-103.017 ccw(c-55.737,-102.718) -55.737,-103.14 ; v1@-56.036,-103.017 ccw(c-55.737,-102.718) -55.737,-103.14 ; -54.226,-103.14 cw(c-54.226,-103.879) R19.1@-53.704,-103.357 ; -54.226,-103.14 ccw(c-54.226,-102.402) R19.1@-53.704,-102.924 ; -54.226,-103.14 cw(c-54.226,-103.879) R19.1@-53.704,-103.357 ; -54.226,-103.14 ccw(c-54.226,-102.402) R19.1@-53.704,-102.924 ; -54.226,-103.14 cw(c-54.226,-103.879) R19.1@-53.704,-103.357 ; -54.226,-103.14 ccw(c-54.226,-102.402) R19.1@-53.704,-102.924 ; -54.226,-103.14 cw(c-54.226,-103.879) R19.1@-53.704,-103.357 ; -54.226,-103.14 ccw(c-54.226,-102.402) R19.1@-53.704,-102.924 ; -54.226,-103.14 ccw(c-54.226,-102.402) R19.1@-53.704,-102.924 ; -54.226,-103.14 cw(c-54.226,-103.879) R19.1@-53.704,-103.357 ; J2.35@-146.923,-66.904 ccw(c-146.923,-66.207) -146.429,-66.7 cw(c-146.923,-66.207) J2.35@-146.923,-66.904 ; J2.35@-146.748,-67.229 cw(c-146.238,-67.229) -146.599,-66.869 ccw(c-146.238,-67.229) J2.35@-146.748,-67.229 ; J2.35@-146.598,-67.229 cw(c-145.726,-67.229) -146.343,-66.613 ccw(c-145.726,-67.229) J2.35@-146.598,-67.229
  Bottom Layer w0.15: v1@-127.888,-62.588 cw(c-128.102,-62.802) -127.8,-62.802 cw(c-127.498,-62.802) v1@-127.712,-62.588 ; v1(-127.8,-62.5) -127.8,-68.079 -124.1,-71.779 -124.1,-105.576 -124.1,-108.521 -120.221,-112.4 -57.8,-112.4 -56.16,-110.76 v1(-56.16,-103.14) ; v1@-56.248,-103.229 cw(c-56.461,-103.442) -56.16,-103.442 cw(c-55.858,-103.442) v1@-56.071,-103.229 ; v1@-127.924,-62.624 cw(c-128.222,-62.922) -127.8,-62.922 ; v1@-127.924,-62.624 cw(c-128.222,-62.922) -127.8,-62.922 ; v1@-127.924,-62.624 cw(c-128.222,-62.922) -127.8,-62.922 ; v1@-127.924,-62.624 cw(c-128.222,-62.922) -127.8,-62.922 ; -127.8,-62.922 cw(c-127.378,-62.922) v1@-127.676,-62.624 ; -127.8,-62.922 cw(c-127.378,-62.922) v1@-127.676,-62.624 ; -127.8,-62.922 cw(c-127.378,-62.922) v1@-127.676,-62.624 ; -127.8,-62.922 cw(c-127.378,-62.922) v1@-127.676,-62.624 ; v1@-56.283,-103.264 cw(c-56.582,-103.563) -56.16,-103.563 ; v1@-56.283,-103.264 cw(c-56.582,-103.563) -56.16,-103.563 ; v1@-56.283,-103.264 cw(c-56.582,-103.563) -56.16,-103.563 ; v1@-56.283,-103.264 cw(c-56.582,-103.563) -56.16,-103.563 ; -56.16,-103.563 cw(c-55.737,-103.563) v1@-56.036,-103.264 ; -56.16,-103.563 cw(c-55.737,-103.563) v1@-56.036,-103.264 ; -56.16,-103.563 cw(c-55.737,-103.563) v1@-56.036,-103.264 ; -56.16,-103.563 cw(c-55.737,-103.563) v1@-56.036,-103.264
GPB1: J2.36